# EAGLE board zxuno_panelizado (EAGLE 7.3.0), part 1 of 3
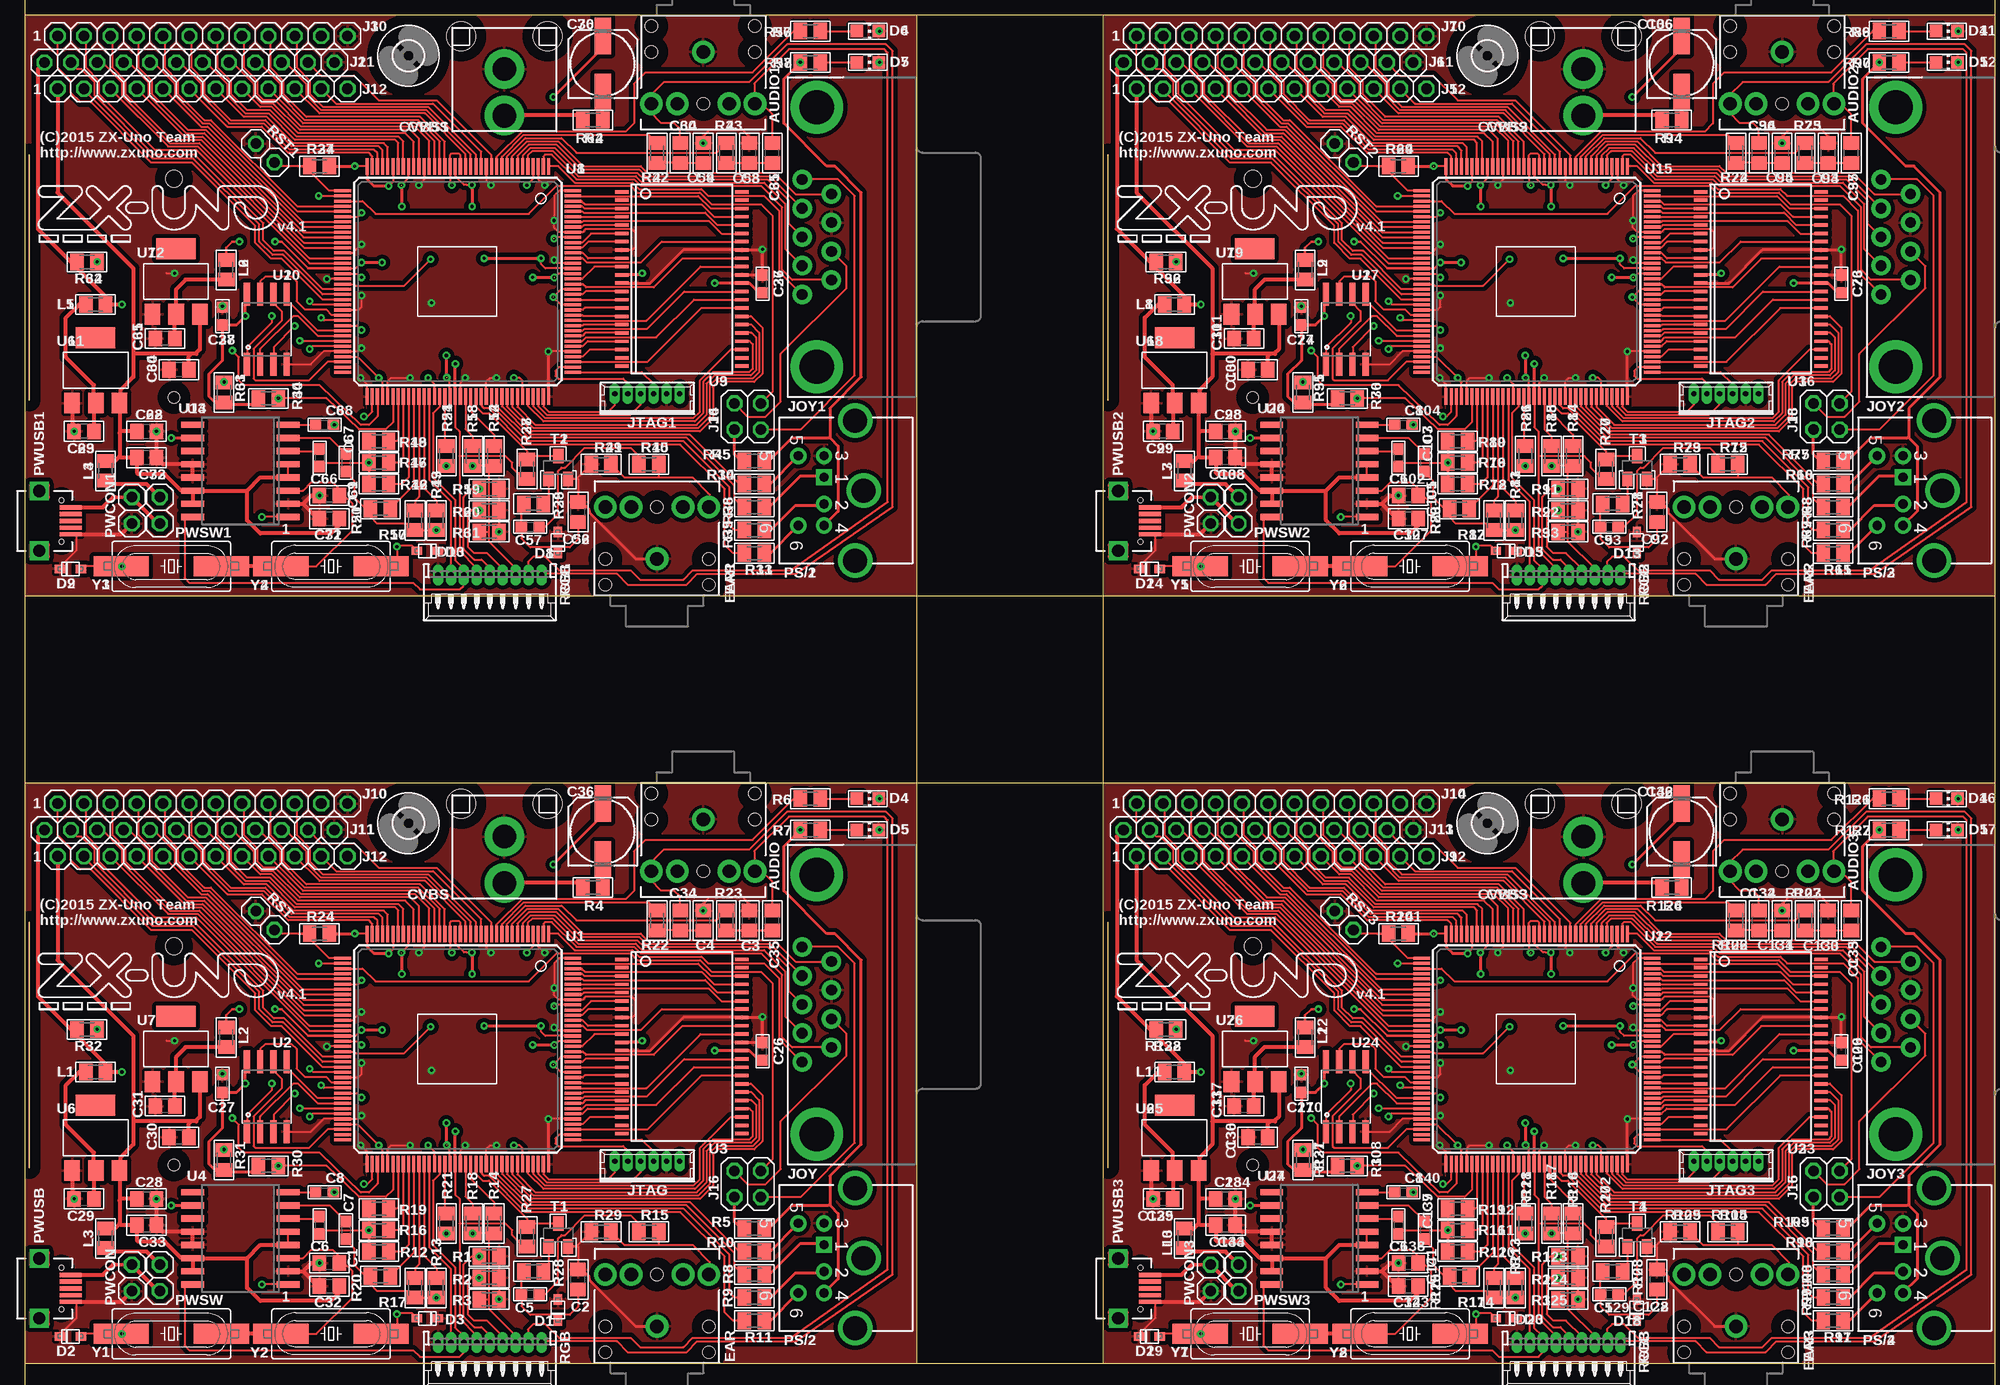
[diagram p0: board, top side]
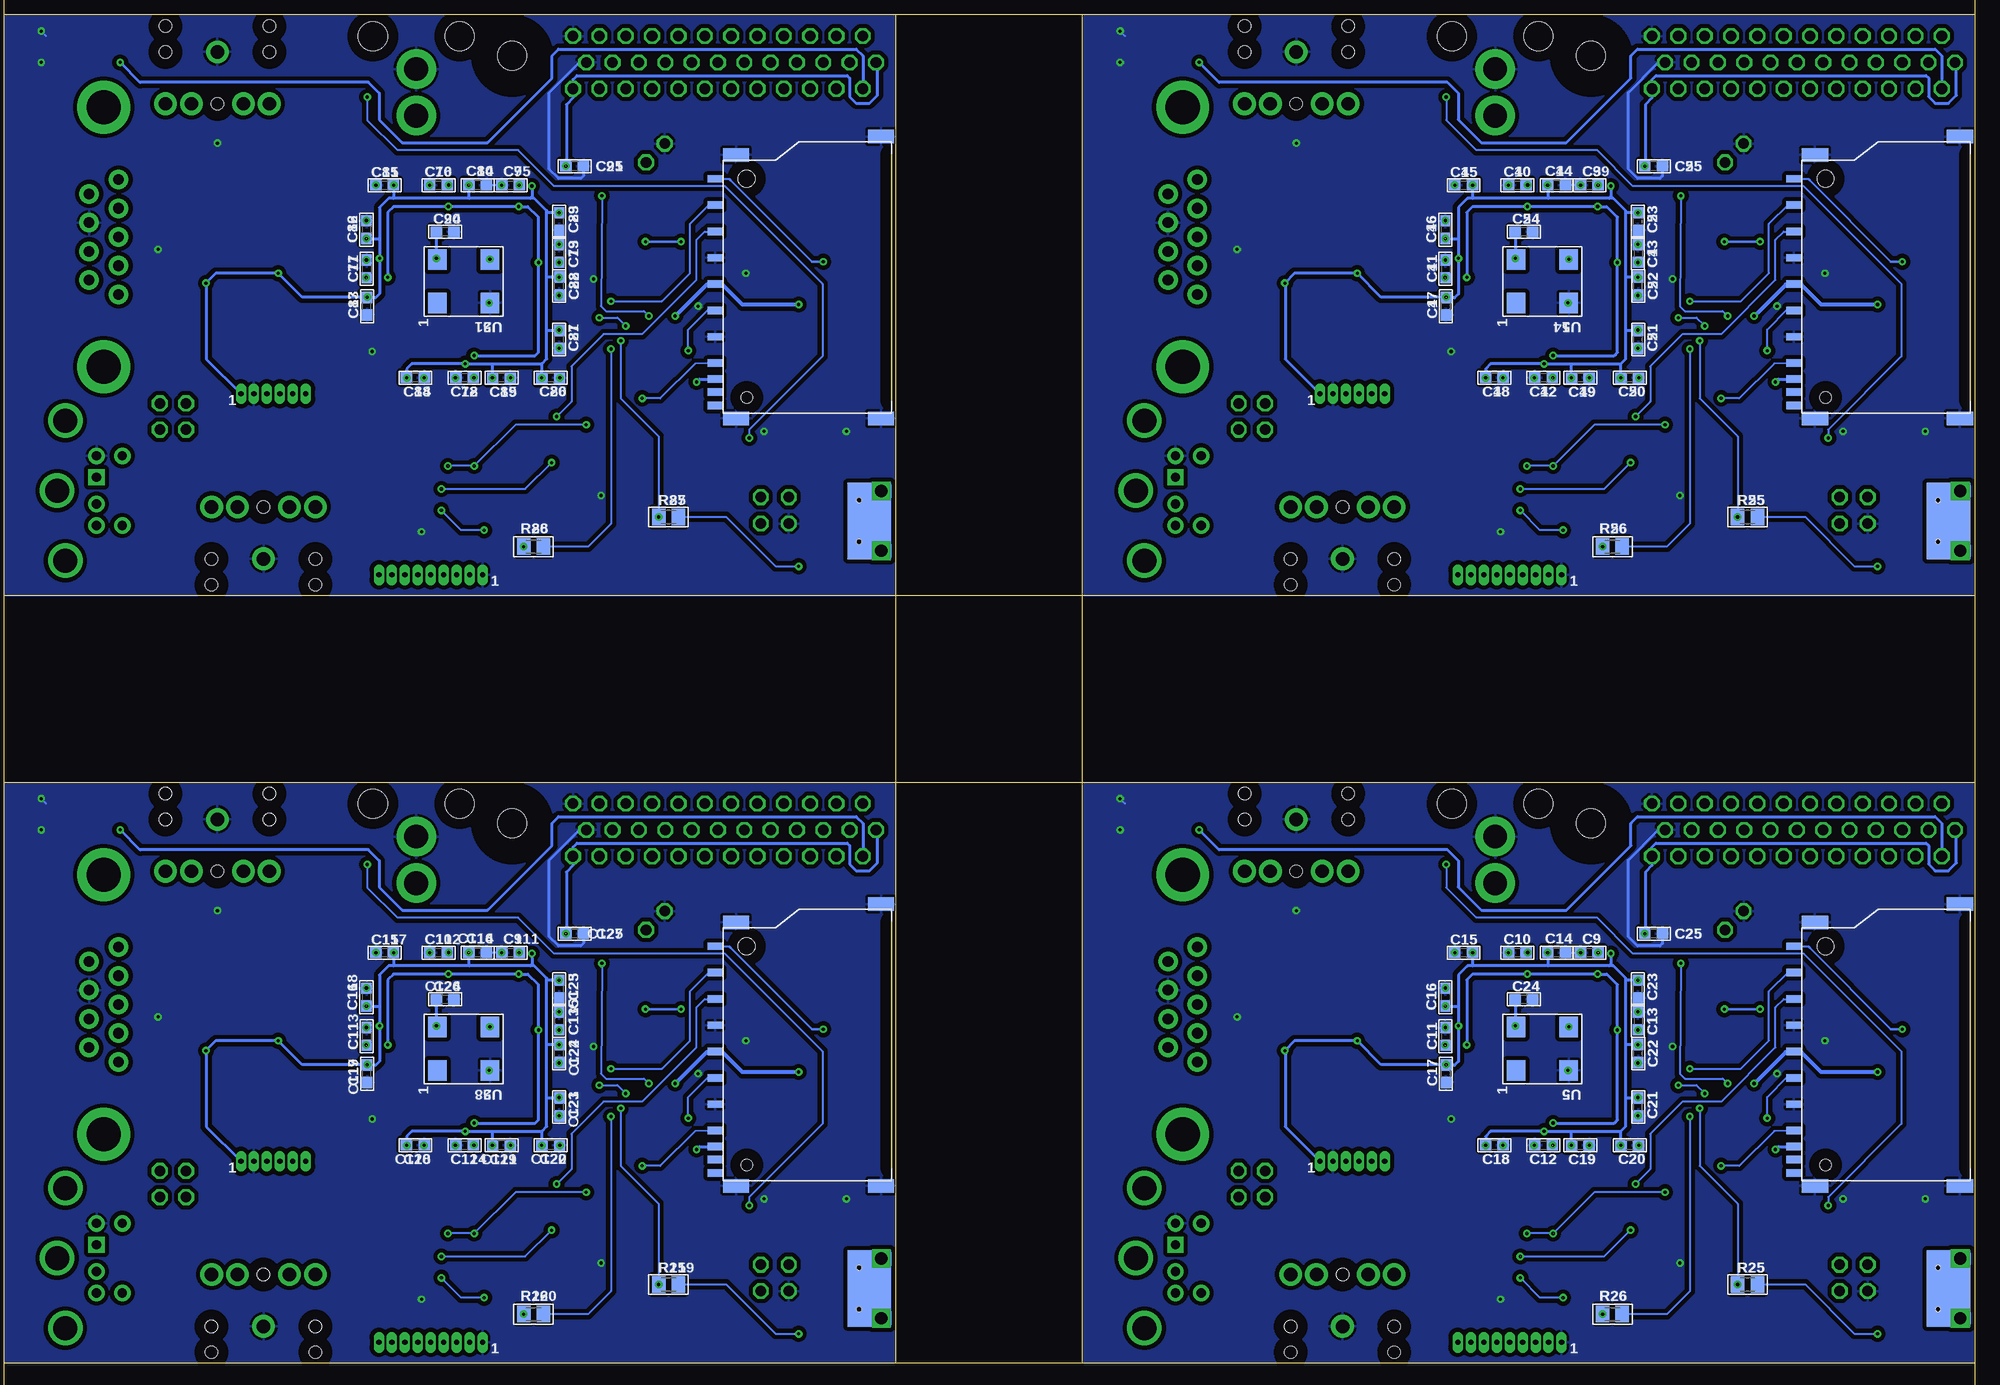
[diagram p1: board, bottom side, seen from below]

Size 104.02 x 97.6 mm. Coordinates in mm from the lower left corner, seen from the top.
Copper layers (1*16): Top 0.035mm / dielectric 1.5mm / Bottom 0.035mm
Design rules "default": minimum track width 10mil, minimum drill 24mil, track to track 8mil, track to pad 8mil, pad to pad 8mil, via to via 8mil, smd to smd 8mil, copper to edge 40mil, drill to drill 8mil, minimum pad ring 10mil, minimum via ring 8mil, stop-mask expansion 4mil, vias tented up to drill 0mil, thermal gap 10mil
Net classes: 0 default: clearance 0.205 mm
Milling: 22 lines

## Footprints (pad centres in the part's own frame; a part is rotated, then mirrored left to right if it is on the bottom)
AUDIO-JACK = drill 1.3 pad 2.184: RING 5,5; RSH 5,2.5; SLEEVE 0,0; TIP 5,-5; TSH 5,-2.5 | hole 1.2: 0,5; -2.5,5; -2.5,-5; 0,-5; 5,0
C0805 = smd 1.3 x 1.5: 1 -0.95,0; 2 0.95,0
C0603 = smd 1.1 x 1: 1 -0.85,0; 2 0.85,0
153CLV-0605 = smd 3.5 x 1.6: + 2.7,0; - -2.7,0
RCA = drill 2.3 pad 3.81: GND 0,0; SIG 0,-4.5 | hole 2.8: -4.175,3.15; 4.175,3.15
SOD-323F = smd 1 x 0.8: A -1,0; C 1,0
CHIP-LED0805 = smd 1.2 x 1.2: A 0,-1.05; C 0,1.05
FIDUCIAL_1MM = smd 1 x 1: 1 0,0
2,8 = hole 2.8: 0,0
1X12 = drill 1.016 octagon: 1 -13.97,0; 2 -11.43,0; 3 -8.89,0; 4 -6.35,0; 5 -3.81,0; 6 -1.27,0; 7 1.27,0; 8 3.81,0; 9 6.35,0; 10 8.89,0; 11 11.43,0; 12 13.97,0
2X02 = drill 1.016 octagon: 1 -1.27,-1.27; 2 -1.27,1.27; 3 1.27,-1.27; 4 1.27,1.27
DB9_MALE = drill 1.016 pad 1.88: 1 5.54,-1.42; 2 2.77,-1.42; 3 0,-1.42; 4 -2.77,-1.42; 5 -5.54,-1.42; 6 4.15,1.42; 7 1.38,1.42; 8 -1.38,1.42; 9 -4.15,1.42 | drill 3.302 pad 5.08: G1 -12.5,0; G2 12.5,0
53047-06 = drill 0.5 pad 0.698 long: 1 3.125,0.45; 2 1.875,0.45; 3 0.625,0.45; 4 -0.625,0.45; 5 -1.875,0.45; 6 -3.125,0.45
M0805 = smd 1.3 x 1.6: 1 -0.95,0; 2 0.95,0
DINC/MIN_TM/6_1PRIMARY = drill 0.889 pad 1.575 square: 1 -1.295,-8.509 | drill 0.889 pad 1.575: 2 1.295,-8.509; 3 -3.353,-8.509; 4 3.353,-8.509; 5 -3.353,-10.998; 6 3.353,-10.998 | drill 2.311 pad 2.845: 7 -6.756,-5.512; 8 0,-4.699; 9 6.756,-5.512
1X02 = drill 1.016 octagon: 1 -1.27,0; 2 1.27,0
MICRO_USB_1PRIMARY = smd 0.406 x 2.108: 1 -1.295,0.381; 2 -0.66,0.381; 3 0,0.381; 4 0.66,0.381; 5 1.295,0.381 | smd 7.366 x 4.191 bottom: 6 0,-1.524 | drill 1.194 pad 1.538 square: 7 -2.87,-2.667; 8 2.87,-2.667 | hole 0.457: -2.007,-0.533; 2.007,-0.533
53048-09 = drill 0.5 pad 0.698 long: 1 5,-1.25; 2 3.75,-1.25; 3 2.5,-1.25; 4 1.25,-1.25; 5 0,-1.25; 6 -1.25,-1.25; 7 -2.5,-1.25; 8 -3.75,-1.25; 9 -5,-1.25
SDCMF-10915W010 = smd 0.711 x 1.422: 1 7.366,13.462; 2 4.826,13.462; 3 2.286,13.462; 4 -0.254,13.462; 5 -2.794,13.462; 6 -5.334,13.462; 7 -7.874,13.462; 8 -9.398,13.462; 9 9.906,13.462; 10 -11.938,13.462; 11 -10.668,13.462 | smd 1.27 x 2.54: M1 12.192,11.43; M2 13.97,-2.54; M3 -13.208,-2.54; M4 -13.208,11.43 | hole 1.6: 9.906,10.414 | hole 1.1: -11.176,10.414
SOT23 = smd 1 x 1.4: 1 -0.95,-1.1; 2 0.95,-1.1; 3 0,1.1
TQ144 = smd 1.6 x 0.3: P1 -11.1,8.75; P2 -11.1,8.25; P3 -11.1,7.75; P4 -11.1,7.25; P5 -11.1,6.75; P6 -11.1,6.25; P7 -11.1,5.75; P8 -11.1,5.25; P9 -11.1,4.75; P10 -11.1,4.25; P11 -11.1,3.75; P12 -11.1,3.25; P13 -11.1,2.75; P14 -11.1,2.25; P15 -11.1,1.75; P16 -11.1,1.25; P17 -11.1,0.75; P18 -11.1,0.25; P19 -11.1,-0.25; P20 -11.1,-0.75; P21 -11.1,-1.25; P22 -11.1,-1.75; P23 -11.1,-2.25; P24 -11.1,-2.75; P25 -11.1,-3.25; P26 -11.1,-3.75; P27 -11.1,-4.25; P28 -11.1,-4.75; P29 -11.1,-5.25; P30 -11.1,-5.75; P31 -11.1,-6.25; P32 -11.1,-6.75; P33 -11.1,-7.25; P34 -11.1,-7.75; P35 -11.1,-8.25; P36 -11.1,-8.75; P73 11.1,-8.75; P74 11.1,-8.25; P75 11.1,-7.75; P76 11.1,-7.25; P77 11.1,-6.75; P78 11.1,-6.25; P79 11.1,-5.75; P80 11.1,-5.25; P81 11.1,-4.75; P82 11.1,-4.25; P83 11.1,-3.75; P84 11.1,-3.25; P85 11.1,-2.75; P86 11.1,-2.25; P87 11.1,-1.75; P88 11.1,-1.25; P89 11.1,-0.75; P90 11.1,-0.25; P91 11.1,0.25; P92 11.1,0.75; P93 11.1,1.25; P94 11.1,1.75; P95 11.1,2.25; P96 11.1,2.75; P97 11.1,3.25; P98 11.1,3.75; P99 11.1,4.25; P100 11.1,4.75; P101 11.1,5.25; P102 11.1,5.75; P103 11.1,6.25; P104 11.1,6.75; P105 11.1,7.25; P106 11.1,7.75; P107 11.1,8.25; P108 11.1,8.75 | smd 0.3 x 1.6: P37 -8.75,-11.1; P38 -8.25,-11.1; P39 -7.75,-11.1; P40 -7.25,-11.1; P41 -6.75,-11.1; P42 -6.25,-11.1; P43 -5.75,-11.1; P44 -5.25,-11.1; P45 -4.75,-11.1; P46 -4.25,-11.1; P47 -3.75,-11.1; P48 -3.25,-11.1; P49 -2.75,-11.1; P50 -2.25,-11.1; P51 -1.75,-11.1; P52 -1.25,-11.1; P53 -0.75,-11.1; P54 -0.25,-11.1; P55 0.25,-11.1; P56 0.75,-11.1; P57 1.25,-11.1; P58 1.75,-11.1; P59 2.25,-11.1; P60 2.75,-11.1; P61 3.25,-11.1; P62 3.75,-11.1; P63 4.25,-11.1; P64 4.75,-11.1; P65 5.25,-11.1; P66 5.75,-11.1; P67 6.25,-11.1; P68 6.75,-11.1; P69 7.25,-11.1; P70 7.75,-11.1; P71 8.25,-11.1; P72 8.75,-11.1; P109 8.75,11.1; P110 8.25,11.1; P111 7.75,11.1; P112 7.25,11.1; P113 6.75,11.1; P114 6.25,11.1; P115 5.75,11.1; P116 5.25,11.1; P117 4.75,11.1; P118 4.25,11.1; P119 3.75,11.1; P120 3.25,11.1; P121 2.75,11.1; P122 2.25,11.1; P123 1.75,11.1; P124 1.25,11.1; P125 0.75,11.1; P126 0.25,11.1; P127 -0.25,11.1; P128 -0.75,11.1; P129 -1.25,11.1; P130 -1.75,11.1; P131 -2.25,11.1; P132 -2.75,11.1; P133 -3.25,11.1; P134 -3.75,11.1; P135 -4.25,11.1; P136 -4.75,11.1; P137 -5.25,11.1; P138 -5.75,11.1; P139 -6.25,11.1; P140 -6.75,11.1; P141 -7.25,11.1; P142 -7.75,11.1; P143 -8.25,11.1; P144 -8.75,11.1
SO08-EIAJ = smd 0.61 x 2.21: 1 -1.905,-3.378; 2 -0.635,-3.378; 3 0.635,-3.378; 4 1.905,-3.378; 5 1.905,3.353; 6 0.635,3.353; 7 -0.635,3.353; 8 -1.905,3.353
TSOP44-II = smd 0.32 x 1.3: 1 -8.4,-5.8; 2 -7.6,-5.8; 3 -6.8,-5.8; 4 -6,-5.8; 5 -5.2,-5.8; 6 -4.4,-5.8; 7 -3.6,-5.8; 8 -2.8,-5.8; 9 -2,-5.8; 10 -1.2,-5.8; 11 -0.4,-5.8; 12 0.4,-5.8; 13 1.2,-5.8; 14 2,-5.8; 15 2.8,-5.8; 16 3.6,-5.8; 17 4.4,-5.8; 18 5.2,-5.8; 19 6,-5.8; 20 6.8,-5.8; 21 7.6,-5.8; 22 8.4,-5.8; 23 8.4,5.8; 24 7.6,5.8; 25 6.8,5.8; 26 6,5.8; 27 5.2,5.8; 28 4.4,5.8; 29 3.6,5.8; 30 2.8,5.8; 31 2,5.8; 32 1.2,5.8; 33 0.4,5.8; 34 -0.4,5.8; 35 -1.2,5.8; 36 -2,5.8; 37 -2.8,5.8; 38 -3.6,5.8; 39 -4.4,5.8; 40 -5.2,5.8; 41 -6,5.8; 42 -6.8,5.8; 43 -7.6,5.8; 44 -8.4,5.8
SO16W = smd 0.6 x 2.2: 1 -4.445,-4.6; 2 -3.175,-4.6; 3 -1.905,-4.6; 4 -0.635,-4.6; 5 0.635,-4.6; 6 1.905,-4.6; 7 3.175,-4.6; 8 4.445,-4.6; 9 4.445,4.6; 10 3.175,4.6; 11 1.905,4.6; 12 0.635,4.6; 13 -0.635,4.6; 14 -1.905,4.6; 15 -3.175,4.6; 16 -4.445,4.6
SM/OSC_1PRIMARY = smd 1.778 x 1.981: 1 0,0; 2 -5.08,0; 3 -5.08,-4.191; 4 0,-4.191
SOT223 = smd 1.499 x 2.007: 1 -2.261,-3.15; 2 0.025,-3.15; 3 2.311,-3.15 | smd 3.81 x 2.007: 4 0,3.15
HC49UP = smd 5.334 x 1.93: 1 -4.826,0; 2 4.826,0

## Placement (x,y rotation side)
AUDIO  Audio  [AUDIO-JACK]  64.99,33.56 270 top
AUDIO1  Audio  [AUDIO-JACK]  64.99,107.54 270 top  (outside the outline)
AUDIO2  Audio  [AUDIO-JACK]  169.01,107.54 270 top  (outside the outline)
AUDIO3  Audio  [AUDIO-JACK]  169.01,33.56 270 top  (outside the outline)
C1  7.5pF  [C0805]  28.96,-9.21 180 top  (outside the outline)
C2  10nF  [C0805]  52.93,-10.8 90 top  (outside the outline)
C3  10nF  [C0805]  69.44,23.81 90 top
C4  10nF  [C0805]  64.99,23.81 90 top
C5  100nF  [C0603]  48.32,-12.22 0 top  (outside the outline)
C6  100nF  [C0603]  28,-5.56 270 top  (outside the outline)
C7  100nF  [C0603]  30.54,-6.03 270 top  (outside the outline)
C8  100nF  [C0603]  28.48,-2.38 0 top
C9  100nF  [C0603]  36.73,20.72 0 bottom
C10  100nF  [C0603]  43.68,20.72 0 bottom
C11  100nF  [C0603]  50.61,12.64 270 bottom
C12  100nF  [C0603]  41.16,2.16 0 bottom
C13  100nF  [C0603]  32.05,14.13 270 bottom
C14  100nF  [C0603]  39.89,20.72 180 bottom
C15  100nF  [C0603]  48.86,20.72 0 bottom
C16  100nF  [C0603]  50.63,16.43 270 bottom
C17  100nF  [C0603]  50.57,9.05 90 bottom
C18  100nF  [C0603]  45.9,2.16 180 bottom
C19  100nF  [C0603]  37.61,2.14 180 bottom
C20  100nF  [C0603]  32.85,2.14 180 bottom
C21  100nF  [C0603]  32.03,5.83 90 bottom
C22  100nF  [C0603]  32.03,10.99 90 bottom
C23  100nF  [C0603]  32.05,17.2 90 bottom
C24  100nF  [C0603]  43.05,16.21 180 bottom
C25  100nF  [C0603]  30.54,22.54 180 bottom
C26  100nF  [C0603]  70.71,11.19 90 top
C27  100nF  [C0603]  18.64,8.1 270 top
C28  10uF  [C0805]  11.33,-3.02 0 top  (outside the outline)
C29  10uF  [C0805]  5.3,-3.02 180 top  (outside the outline)
C30  10uF  [C0805]  14.45,2.92 180 top
C31  10uF  [C0805]  13.11,5.92 180 top
C32  10uF  [C0805]  28.96,-11.43 0 top  (outside the outline)
C33  10uF  [C0805]  11.33,-5.56 180 top  (outside the outline)
C34  10uF  [C0805]  62.77,23.81 90 top
C35  10uF  [C0805]  71.66,23.81 90 top
C36  220uF  [153CLV-0605]  55.31,32.38 90 top
C37  100nF  [C0603]  70.71,85.17 90 top
C38  100nF  [C0603]  18.64,82.07 270 top
C39  100nF  [C0603]  36.73,94.69 0 bottom
C40  100nF  [C0603]  43.68,94.69 0 bottom
C41  100nF  [C0603]  50.61,86.62 270 bottom
C42  100nF  [C0603]  41.16,76.14 0 bottom
C43  100nF  [C0603]  32.05,88.11 270 bottom
C44  100nF  [C0603]  39.89,94.69 180 bottom
C45  100nF  [C0603]  48.86,94.69 0 bottom
C46  100nF  [C0603]  50.63,90.41 270 bottom
C47  100nF  [C0603]  50.57,83.03 90 bottom
C48  100nF  [C0603]  45.9,76.14 180 bottom
C49  100nF  [C0603]  37.61,76.12 180 bottom
C50  100nF  [C0603]  32.85,76.12 180 bottom
C51  100nF  [C0603]  32.03,79.81 90 bottom
C52  100nF  [C0603]  32.03,84.97 90 bottom
C53  100nF  [C0603]  32.05,91.18 90 bottom
C54  100nF  [C0603]  43.05,90.19 180 bottom
C55  100nF  [C0603]  30.54,96.52 180 bottom
C56  10nF  [C0805]  52.93,63.18 90 top
C57  100nF  [C0603]  48.32,61.75 0 top
C58  10nF  [C0805]  69.44,97.79 90 top
C59  10nF  [C0805]  64.99,97.79 90 top
C60  10uF  [C0805]  62.77,97.79 90 top
C61  10uF  [C0805]  71.66,97.79 90 top
C62  10uF  [C0805]  11.33,70.96 0 top
C63  10uF  [C0805]  5.3,70.96 180 top
C64  10uF  [C0805]  14.45,76.9 180 top
C65  10uF  [C0805]  13.11,79.9 180 top
C66  100nF  [C0603]  28,68.42 270 top
C67  100nF  [C0603]  30.54,67.94 270 top
C68  100nF  [C0603]  28.48,71.6 0 top
C69  7.5pF  [C0805]  28.96,64.77 180 top
C70  220uF  [153CLV-0605]  55.31,106.36 90 top  (outside the outline)
C71  10uF  [C0805]  28.96,62.55 0 top
C72  10uF  [C0805]  11.33,68.42 180 top
C73  100nF  [C0603]  174.73,85.17 90 top  (outside the outline)
C74  100nF  [C0603]  122.66,82.07 270 top  (outside the outline)
C75  100nF  [C0603]  140.76,94.69 0 bottom  (outside the outline)
C76  100nF  [C0603]  147.7,94.69 0 bottom  (outside the outline)
C77  100nF  [C0603]  154.63,86.62 270 bottom  (outside the outline)
C78  100nF  [C0603]  145.18,76.14 0 bottom  (outside the outline)
C79  100nF  [C0603]  136.07,88.11 270 bottom  (outside the outline)
C80  100nF  [C0603]  143.91,94.69 180 bottom  (outside the outline)
C81  100nF  [C0603]  152.88,94.69 0 bottom  (outside the outline)
C82  100nF  [C0603]  154.65,90.41 270 bottom  (outside the outline)
C83  100nF  [C0603]  154.59,83.03 90 bottom  (outside the outline)
C84  100nF  [C0603]  149.92,76.14 180 bottom  (outside the outline)
C85  100nF  [C0603]  141.63,76.12 180 bottom  (outside the outline)
C86  100nF  [C0603]  136.87,76.12 180 bottom  (outside the outline)
C87  100nF  [C0603]  136.05,79.81 90 bottom  (outside the outline)
C88  100nF  [C0603]  136.05,84.97 90 bottom  (outside the outline)
C89  100nF  [C0603]  136.07,91.18 90 bottom  (outside the outline)
C90  100nF  [C0603]  147.07,90.19 180 bottom  (outside the outline)
C91  100nF  [C0603]  134.56,96.52 180 bottom  (outside the outline)
C92  10nF  [C0805]  156.95,63.18 90 top  (outside the outline)
C93  100nF  [C0603]  152.34,61.75 0 top  (outside the outline)
C94  10nF  [C0805]  173.46,97.79 90 top  (outside the outline)
C95  10nF  [C0805]  169.01,97.79 90 top  (outside the outline)
C96  10uF  [C0805]  166.79,97.79 90 top  (outside the outline)
C97  10uF  [C0805]  175.68,97.79 90 top  (outside the outline)
C98  10uF  [C0805]  115.36,70.96 0 top  (outside the outline)
C99  10uF  [C0805]  109.32,70.96 180 top  (outside the outline)
C100  10uF  [C0805]  118.47,76.9 180 top  (outside the outline)
C101  10uF  [C0805]  117.13,79.9 180 top  (outside the outline)
C102  100nF  [C0603]  132.02,68.42 270 top  (outside the outline)
C103  100nF  [C0603]  134.56,67.94 270 top  (outside the outline)
C104  100nF  [C0603]  132.5,71.6 0 top  (outside the outline)
C105  7.5pF  [C0805]  132.98,64.77 180 top  (outside the outline)
C106  220uF  [153CLV-0605]  159.33,106.36 90 top  (outside the outline)
C107  10uF  [C0805]  132.98,62.55 0 top  (outside the outline)
C108  10uF  [C0805]  115.36,68.42 180 top  (outside the outline)
C109  100nF  [C0603]  174.73,11.19 90 top  (outside the outline)
C110  100nF  [C0603]  122.66,8.1 270 top  (outside the outline)
C111  100nF  [C0603]  140.76,20.72 0 bottom  (outside the outline)
C112  100nF  [C0603]  147.7,20.72 0 bottom  (outside the outline)
C113  100nF  [C0603]  154.63,12.64 270 bottom  (outside the outline)
C114  100nF  [C0603]  145.18,2.16 0 bottom  (outside the outline)
C115  100nF  [C0603]  136.07,14.13 270 bottom  (outside the outline)
C116  100nF  [C0603]  143.91,20.72 180 bottom  (outside the outline)
C117  100nF  [C0603]  152.88,20.72 0 bottom  (outside the outline)
C118  100nF  [C0603]  154.65,16.43 270 bottom  (outside the outline)
C119  100nF  [C0603]  154.59,9.05 90 bottom  (outside the outline)
C120  100nF  [C0603]  149.92,2.16 180 bottom  (outside the outline)
C121  100nF  [C0603]  141.63,2.14 180 bottom  (outside the outline)
C122  100nF  [C0603]  136.87,2.14 180 bottom  (outside the outline)
C123  100nF  [C0603]  136.05,5.83 90 bottom  (outside the outline)
C124  100nF  [C0603]  136.05,10.99 90 bottom  (outside the outline)
C125  100nF  [C0603]  136.07,17.2 90 bottom  (outside the outline)
C126  100nF  [C0603]  147.07,16.21 180 bottom  (outside the outline)
C127  100nF  [C0603]  134.56,22.54 180 bottom  (outside the outline)
C128  10nF  [C0805]  156.95,-10.8 90 top  (outside the outline)
C129  100nF  [C0603]  152.34,-12.22 0 top  (outside the outline)
C130  10nF  [C0805]  173.46,23.81 90 top  (outside the outline)
C131  10nF  [C0805]  169.01,23.81 90 top  (outside the outline)
C132  10uF  [C0805]  166.79,23.81 90 top  (outside the outline)
C133  10uF  [C0805]  175.68,23.81 90 top  (outside the outline)
C134  10uF  [C0805]  115.36,-3.02 0 top  (outside the outline)
C135  10uF  [C0805]  109.32,-3.02 180 top  (outside the outline)
C136  10uF  [C0805]  118.47,2.92 180 top  (outside the outline)
C137  10uF  [C0805]  117.13,5.92 180 top  (outside the outline)
C138  100nF  [C0603]  132.02,-5.56 270 top  (outside the outline)
C139  100nF  [C0603]  134.56,-6.03 270 top  (outside the outline)
C140  100nF  [C0603]  132.5,-2.38 0 top  (outside the outline)
C141  7.5pF  [C0805]  132.98,-9.21 180 top  (outside the outline)
C142  220uF  [153CLV-0605]  159.33,32.38 90 top  (outside the outline)
C143  10uF  [C0805]  132.98,-11.43 0 top  (outside the outline)
C144  10uF  [C0805]  115.36,-5.56 180 top  (outside the outline)
CVBS  RCA  [RCA]  45.82,31.91 0 top
CVBS1  RCA  [RCA]  45.82,105.89 0 top  (outside the outline)
CVBS2  RCA  [RCA]  149.84,105.89 0 top  (outside the outline)
CVBS3  RCA  [RCA]  149.84,31.91 0 top  (outside the outline)
D1  [SOD-323F]  50.98,-13.73 270 top  (outside the outline)
D2  [SOD-323F]  3.99,-16.27 180 top  (outside the outline)
D3  [SOD-323F]  38.4,-14.53 0 top  (outside the outline)
D4  [CHIP-LED0805]  80.87,35.56 270 top
D5  [CHIP-LED0805]  80.87,32.54 270 top
D6  [CHIP-LED0805]  80.87,109.54 270 top  (outside the outline)
D7  [CHIP-LED0805]  80.87,106.52 270 top  (outside the outline)
D8  [SOD-323F]  50.98,60.25 270 top
D9  [SOD-323F]  3.99,57.71 180 top
D10  [SOD-323F]  38.4,59.44 0 top
D11  [CHIP-LED0805]  184.89,109.54 270 top  (outside the outline)
D12  [CHIP-LED0805]  184.89,106.52 270 top  (outside the outline)
D13  [SOD-323F]  155,60.25 270 top  (outside the outline)
D14  [SOD-323F]  108.01,57.71 180 top
D15  [SOD-323F]  142.42,59.44 0 top  (outside the outline)
D16  [CHIP-LED0805]  184.89,35.56 270 top  (outside the outline)
D17  [CHIP-LED0805]  184.89,32.54 270 top  (outside the outline)
D18  [SOD-323F]  155,-13.73 270 top  (outside the outline)
D19  [SOD-323F]  108.01,-16.27 180 top  (outside the outline)
D20  [SOD-323F]  142.42,-14.53 0 top  (outside the outline)
E$1  [FIDUCIAL_1MM]  4.67,-23.81 0 top  (outside the outline)
E$2  [FIDUCIAL_1MM]  185.01,115.89 0 top  (outside the outline)
EAR  EAR  [AUDIO-JACK]  60.55,-15.3 90 top  (outside the outline)
EAR1  EAR  [AUDIO-JACK]  60.55,58.67 90 top
EAR2  EAR  [AUDIO-JACK]  164.57,58.67 90 top  (outside the outline)
EAR3  EAR  [AUDIO-JACK]  164.57,-15.3 90 top  (outside the outline)
H1  MOUNT-HOLE2.8  [2,8]  36.58,33.18 0 top
H2  MOUNT-HOLE2.8  [2,8]  36.58,107.16 0 top  (outside the outline)
H3  MOUNT-HOLE2.8  [2,8]  140.6,107.16 0 top  (outside the outline)
H4  MOUNT-HOLE2.8  [2,8]  140.6,33.18 0 top  (outside the outline)
J1  [1X12]  16.73,103.98 0 top  (outside the outline)
J2  [1X12]  15.46,106.52 0 top  (outside the outline)
J3  [1X12]  16.73,109.06 0 top  (outside the outline)
J4  [2X02]  69.28,72.39 180 top
J5  [1X12]  120.75,103.98 0 top  (outside the outline)
J6  [1X12]  119.48,106.52 0 top  (outside the outline)
J7  [1X12]  120.75,109.06 0 top  (outside the outline)
J8  [2X02]  173.3,72.39 180 top  (outside the outline)
J9  [1X12]  120.75,30 0 top
J10  [1X12]  16.73,35.08 0 top
J11  [1X12]  15.46,32.54 0 top
J12  [1X12]  16.73,30 0 top
J13  [1X12]  119.48,32.54 0 top
J14  [1X12]  120.75,35.08 0 top
J15  [2X02]  173.3,-1.59 180 top  (outside the outline)
J16  [2X02]  69.28,-1.59 180 top
JOY  [DB9_MALE]  75.95,15.72 270 top
JOY1  [DB9_MALE]  75.95,89.69 270 top
JOY2  [DB9_MALE]  179.97,89.69 270 top  (outside the outline)
JOY3  [DB9_MALE]  179.97,15.72 270 top  (outside the outline)
JTAG  JTAG  [53047-06]  59.59,0.16 0 top
JTAG1  JTAG  [53047-06]  59.59,74.14 0 top
JTAG2  JTAG  [53047-06]  163.62,74.14 0 top  (outside the outline)
JTAG3  JTAG  [53047-06]  163.62,0.16 0 top  (outside the outline)
L1  [M0805]  6.41,9.21 0 top
L2  [M0805]  19.01,12.56 90 top
L3  [M0805]  7.37,-6.83 90 top  (outside the outline)
L4  [M0805]  7.37,67.15 90 top
L5  [M0805]  6.41,83.19 0 top
L6  [M0805]  19.01,86.53 90 top
L7  [M0805]  111.39,67.15 90 top  (outside the outline)
L8  [M0805]  110.43,83.19 0 top  (outside the outline)
L9  [M0805]  123.03,86.53 90 top  (outside the outline)
L10  [M0805]  111.39,-6.83 90 top  (outside the outline)
L11  [M0805]  110.43,9.21 0 top  (outside the outline)
L12  [M0805]  123.03,12.56 90 top  (outside the outline)
PS/1  PS/2 Keyb  [DINC/MIN_TM/6_1PRIMARY]  85.15,65.25 270 top
PS/2  PS/2 Keyb  [DINC/MIN_TM/6_1PRIMARY]  85.15,-8.73 270 top
PS/3  PS/2 Keyb  [DINC/MIN_TM/6_1PRIMARY]  189.17,65.25 270 top  (outside the outline)
PS/4  PS/2 Keyb  [DINC/MIN_TM/6_1PRIMARY]  189.17,-8.73 270 top  (outside the outline)
PWCON  [1X02]  9.91,-10.64 90 top  (outside the outline)
PWCON1  [1X02]  9.91,63.34 90 top
PWCON2  [1X02]  113.93,63.34 90 top  (outside the outline)
PWCON3  [1X02]  113.93,-10.64 90 top  (outside the outline)
PWSW  [1X02]  12.6,-10.64 270 top  (outside the outline)
PWSW1  [1X02]  12.6,63.34 270 top
PWSW2  [1X02]  116.63,63.34 270 top  (outside the outline)
PWSW3  [1X02]  116.63,-10.64 270 top  (outside the outline)
PWUSB  MICROUSB  [MICRO_USB_1PRIMARY]  3.65,-11.65 270 top  (outside the outline)
PWUSB1  MICROUSB  [MICRO_USB_1PRIMARY]  3.65,62.33 270 top
PWUSB2  MICROUSB  [MICRO_USB_1PRIMARY]  107.67,62.33 270 top
PWUSB3  MICROUSB  [MICRO_USB_1PRIMARY]  107.67,-11.65 270 top  (outside the outline)
R1  75  [M0805]  44.35,-8.57 0 top  (outside the outline)
R2  75  [M0805]  44.35,-10.64 0 top  (outside the outline)
R3  75  [M0805]  44.35,-12.7 0 top  (outside the outline)
R4  75  [M0805]  54.36,26.99 180 top
R5  510  [M0805]  69.91,-5.87 180 top  (outside the outline)
R6  510  [M0805]  75.31,35.56 180 top
R7  510  [M0805]  75.31,32.54 180 top
R8  510  [M0805]  69.91,-10.32 180 top  (outside the outline)
R9  510  [M0805]  69.91,-12.54 180 top  (outside the outline)
R10  510  [M0805]  69.91,-8.1 180 top  (outside the outline)
R11  510  [M0805]  69.91,-14.76 180 top  (outside the outline)
R12  510  [M0805]  33.72,-8.1 0 top  (outside the outline)
R13  510  [M0805]  39.27,-11.59 90 top  (outside the outline)
R14  510  [M0805]  44.83,-5.4 90 top  (outside the outline)
R15  510  [M0805]  59.75,-6.19 180 top  (outside the outline)
R16  1K  [M0805]  33.72,-6.03 0 top  (outside the outline)
R17  1K  [M0805]  37.21,-11.59 90 top  (outside the outline)
R18  1K  [M0805]  42.77,-5.4 90 top  (outside the outline)
R19  2K  [M0805]  33.72,-3.97 0 top  (outside the outline)
R20  2K  [M0805]  33.88,-10.48 0 top  (outside the outline)
R21  2K  [M0805]  40.23,-5.4 90 top  (outside the outline)
R22  2K  [M0805]  60.55,23.81 90 top
R23  2K  [M0805]  67.21,23.81 90 top
R24  2K  [M0805]  28,22.54 0 top
R25  10K  [M0805]  21.49,-11.27 0 bottom  (outside the outline)
R26  10K  [M0805]  34.51,-14.13 0 bottom  (outside the outline)
R27  10K  [M0805]  48.01,-6.67 270 top  (outside the outline)
R28  10K  [M0805]  48.64,-10 0 top  (outside the outline)
R29  10K  [M0805]  55.15,-6.19 180 top  (outside the outline)
R30  10K  [M0805]  23.08,0.16 0 top
R31  10K  [M0805]  18.8,0.73 270 top
R32  10K  [M0805]  5.59,13.3 180 top
R33  510  [M0805]  69.91,59.21 180 top
R34  510  [M0805]  69.91,65.88 180 top
R35  510  [M0805]  69.91,61.44 180 top
R36  510  [M0805]  69.91,63.66 180 top
R37  2K  [M0805]  28,96.52 0 top
R38  10K  [M0805]  48.01,67.31 270 top
R39  10K  [M0805]  48.64,63.98 0 top
R40  510  [M0805]  59.75,67.79 180 top
R41  10K  [M0805]  55.15,67.79 180 top
R42  2K  [M0805]  60.55,97.79 90 top
R43  2K  [M0805]  67.21,97.79 90 top
R44  10K  [M0805]  23.08,74.14 0 top
R45  510  [M0805]  69.91,68.1 180 top
R46  510  [M0805]  33.72,65.88 0 top
R47  1K  [M0805]  33.72,67.94 0 top
R48  2K  [M0805]  33.72,70.01 0 top
R49  510  [M0805]  39.27,62.39 90 top
R50  1K  [M0805]  37.21,62.39 90 top
R51  2K  [M0805]  33.88,63.5 0 top
R52  510  [M0805]  44.83,68.58 90 top
R53  1K  [M0805]  42.77,68.58 90 top
R54  2K  [M0805]  40.23,68.58 90 top
R55  10K  [M0805]  21.49,62.71 0 bottom
R56  10K  [M0805]  34.51,59.85 0 bottom
R57  510  [M0805]  75.31,109.54 180 top  (outside the outline)
R58  510  [M0805]  75.31,106.52 180 top  (outside the outline)
R59  75  [M0805]  44.35,65.41 0 top
R60  75  [M0805]  44.35,63.34 0 top
R61  75  [M0805]  44.35,61.28 0 top
R62  75  [M0805]  54.36,100.97 180 top  (outside the outline)
R63  10K  [M0805]  18.8,74.71 270 top
R64  10K  [M0805]  5.59,87.28 180 top
R65  510  [M0805]  173.93,59.21 180 top  (outside the outline)
R66  510  [M0805]  173.93,65.88 180 top  (outside the outline)
R67  510  [M0805]  173.93,61.44 180 top  (outside the outline)
R68  510  [M0805]  173.93,63.66 180 top  (outside the outline)
R69  2K  [M0805]  132.02,96.52 0 top  (outside the outline)
R70  10K  [M0805]  152.03,67.31 270 top  (outside the outline)
R71  10K  [M0805]  152.66,63.98 0 top  (outside the outline)
R72  510  [M0805]  163.77,67.79 180 top  (outside the outline)
R73  10K  [M0805]  159.17,67.79 180 top  (outside the outline)
R74  2K  [M0805]  164.57,97.79 90 top  (outside the outline)
R75  2K  [M0805]  171.24,97.79 90 top  (outside the outline)
R76  10K  [M0805]  127.1,74.14 0 top  (outside the outline)
R77  510  [M0805]  173.93,68.1 180 top  (outside the outline)
R78  510  [M0805]  137.74,65.88 0 top  (outside the outline)
R79  1K  [M0805]  137.74,67.94 0 top  (outside the outline)
R80  2K  [M0805]  137.74,70.01 0 top  (outside the outline)
R81  510  [M0805]  143.3,62.39 90 top  (outside the outline)
R82  1K  [M0805]  141.23,62.39 90 top  (outside the outline)
R83  2K  [M0805]  137.9,63.5 0 top  (outside the outline)
R84  510  [M0805]  148.85,68.58 90 top  (outside the outline)
R85  1K  [M0805]  146.79,68.58 90 top  (outside the outline)
R86  2K  [M0805]  144.25,68.58 90 top  (outside the outline)
R87  10K  [M0805]  125.52,62.71 0 bottom  (outside the outline)
R88  10K  [M0805]  138.53,59.85 0 bottom  (outside the outline)
R89  510  [M0805]  179.33,109.54 180 top  (outside the outline)
R90  510  [M0805]  179.33,106.52 180 top  (outside the outline)
R91  75  [M0805]  148.38,65.41 0 top  (outside the outline)
R92  75  [M0805]  148.38,63.34 0 top  (outside the outline)
R93  75  [M0805]  148.38,61.28 0 top  (outside the outline)
R94  75  [M0805]  158.38,100.97 180 top  (outside the outline)
R95  10K  [M0805]  122.82,74.71 270 top  (outside the outline)
R96  10K  [M0805]  109.61,87.28 180 top  (outside the outline)
R97  510  [M0805]  173.93,-14.76 180 top  (outside the outline)
R98  510  [M0805]  173.93,-8.1 180 top  (outside the outline)
R99  510  [M0805]  173.93,-12.54 180 top  (outside the outline)
R100  510  [M0805]  173.93,-10.32 180 top  (outside the outline)
R101  2K  [M0805]  132.02,22.54 0 top  (outside the outline)
R102  10K  [M0805]  152.03,-6.67 270 top  (outside the outline)
R103  10K  [M0805]  152.66,-10 0 top  (outside the outline)
R104  510  [M0805]  163.77,-6.19 180 top  (outside the outline)
R105  10K  [M0805]  159.17,-6.19 180 top  (outside the outline)
R106  2K  [M0805]  164.57,23.81 90 top  (outside the outline)
R107  2K  [M0805]  171.24,23.81 90 top  (outside the outline)
R108  10K  [M0805]  127.1,0.16 0 top  (outside the outline)
R109  510  [M0805]  173.93,-5.87 180 top  (outside the outline)
R110  510  [M0805]  137.74,-8.1 0 top  (outside the outline)
R111  1K  [M0805]  137.74,-6.03 0 top  (outside the outline)
R112  2K  [M0805]  137.74,-3.97 0 top  (outside the outline)
R113  510  [M0805]  143.3,-11.59 90 top  (outside the outline)
R114  1K  [M0805]  141.23,-11.59 90 top  (outside the outline)
R115  2K  [M0805]  137.9,-10.48 0 top  (outside the outline)
R116  510  [M0805]  148.85,-5.4 90 top  (outside the outline)
R117  1K  [M0805]  146.79,-5.4 90 top  (outside the outline)
R118  2K  [M0805]  144.25,-5.4 90 top  (outside the outline)
R119  10K  [M0805]  125.52,-11.27 0 bottom  (outside the outline)
R120  10K  [M0805]  138.53,-14.13 0 bottom  (outside the outline)
R121  510  [M0805]  179.33,35.56 180 top  (outside the outline)
R122  510  [M0805]  179.33,32.54 180 top  (outside the outline)
R123  75  [M0805]  148.38,-8.57 0 top  (outside the outline)
R124  75  [M0805]  148.38,-10.64 0 top  (outside the outline)
R125  75  [M0805]  148.38,-12.7 0 top  (outside the outline)
R126  75  [M0805]  158.38,26.99 180 top  (outside the outline)
R127  10K  [M0805]  122.82,0.73 270 top  (outside the outline)
R128  10K  [M0805]  109.61,13.3 180 top  (outside the outline)
RGB  RGB  [53048-09]  44.42,-18.1 180 top  (outside the outline)
RGB1  RGB  [53048-09]  44.42,55.88 180 top
RGB2  RGB  [53048-09]  148.44,55.88 180 top  (outside the outline)
RGB3  RGB  [53048-09]  148.44,-18.1 180 top  (outside the outline)
RST  [1X02]  22.76,23.81 315 top
RST1  [1X02]  22.76,97.79 315 top
RST2  [1X02]  126.79,97.79 315 top  (outside the outline)
RST3  [1X02]  126.79,23.81 315 top  (outside the outline)
SDCARD  [SDCMF-10915W010]  3.56,11.43 90 bottom
SDCARD1  [SDCMF-10915W010]  3.56,85.41 90 bottom
SDCARD2  [SDCMF-10915W010]  107.58,85.41 90 bottom
SDCARD3  [SDCMF-10915W010]  107.58,11.43 90 bottom
T1  BC846  [SOT23]  51.02,-6.51 0 top  (outside the outline)
T2  BC846  [SOT23]  51.02,67.47 0 top
T3  BC846  [SOT23]  155.04,67.47 0 top  (outside the outline)
T4  BC846  [SOT23]  155.04,-6.51 0 top  (outside the outline)
U1  6SLX9TQG144  [TQ144]  41.34,11.43 270 top
U2  FLASH-SPI-25XXSMD1  [SO08-EIAJ]  22.92,6.83 0 top
U3  [TSOP44-II]  62.93,11.67 270 top
U4  AD724  [SO16W]  20.38,-6.83 90 top
U5  50MHz  [SM/OSC_1PRIMARY]  43.8,9.37 180 bottom
U6  3.3V  [SOT223]  6.41,2.86 0 top
U7  1.2V  [SOT223]  14.16,11.43 0 top
U8  6SLX9TQG144  [TQ144]  41.34,85.41 270 top
U9  [TSOP44-II]  62.93,85.65 270 top
U10  FLASH-SPI-25XXSMD1  [SO08-EIAJ]  22.92,80.8 0 top
U11  3.3V  [SOT223]  6.41,76.84 0 top
U12  1.2V  [SOT223]  14.16,85.41 0 top
U13  AD724  [SO16W]  20.38,67.15 90 top
U14  50MHz  [SM/OSC_1PRIMARY]  43.8,83.34 180 bottom
U15  6SLX9TQG144  [TQ144]  145.36,85.41 270 top  (outside the outline)
U16  [TSOP44-II]  166.95,85.65 270 top  (outside the outline)
U17  FLASH-SPI-25XXSMD1  [SO08-EIAJ]  126.94,80.8 0 top  (outside the outline)
U18  3.3V  [SOT223]  110.43,76.84 0 top  (outside the outline)
U19  1.2V  [SOT223]  118.18,85.41 0 top  (outside the outline)
U20  AD724  [SO16W]  124.4,67.15 90 top  (outside the outline)
U21  50MHz  [SM/OSC_1PRIMARY]  147.82,83.34 180 bottom  (outside the outline)
U22  6SLX9TQG144  [TQ144]  145.36,11.43 270 top  (outside the outline)
U23  [TSOP44-II]  166.95,11.67 270 top  (outside the outline)
U24  FLASH-SPI-25XXSMD1  [SO08-EIAJ]  126.94,6.83 0 top  (outside the outline)
U25  3.3V  [SOT223]  110.43,2.86 0 top  (outside the outline)
U26  1.2V  [SOT223]  118.18,11.43 0 top  (outside the outline)
U27  AD724  [SO16W]  124.4,-6.83 90 top  (outside the outline)
U28  50MHz  [SM/OSC_1PRIMARY]  147.82,9.37 180 bottom  (outside the outline)
Y1  3.58M  [HC49UP]  13.72,-16.03 0 top  (outside the outline)
Y2  4.43M  [HC49UP]  29.11,-16.03 180 top  (outside the outline)
Y3  3.58M  [HC49UP]  13.72,57.94 0 top
Y4  4.43M  [HC49UP]  29.11,57.94 180 top
Y5  3.58M  [HC49UP]  117.74,57.94 0 top  (outside the outline)
Y6  4.43M  [HC49UP]  133.14,57.94 180 top  (outside the outline)
Y7  3.58M  [HC49UP]  117.74,-16.03 0 top  (outside the outline)
Y8  4.43M  [HC49UP]  133.14,-16.03 180 top  (outside the outline)

## Library data of the parts
AUDIO AUDIO1-AUDIO3 EAR EAR1-EAR3 JOY JOY1-JOY3 = SparkFun-Connectors
C1-C144 L1-L12 R1-R128 = rcl
CVBS CVBS1-CVBS3 = uzebox
D1-D3 D8-D10 D13-D15 D18-D20 E$1 E$2 = adafruit
D4-D7 D11 D12 D16 D17 = led
H1-H4 = holes
J1-J16 PWCON PWCON1-PWCON3 PWSW PWSW1-PWSW3 RST RST1-RST3 = pinhead
JTAG JTAG1-JTAG3 = con-molex; MPN: 53047-0610-C; OC_FARNELL: 9733078; OC_NEWARK: 03M2965
PS/1-PS/4 = ZX_UNO_0_14
PWUSB PWUSB1-PWUSB3 SDCARD SDCARD1-SDCARD3 = zxuno_rev_mcleod
RGB RGB1-RGB3 = con-molex; MPN: 53048-0910; OC_FARNELL: 1012239; OC_NEWARK: 98K9837
T1-T4 = transistor
U1 U8 U15 U22 = xilinx_devices_V6
U2 U3 U9 U10 U16 U17 U23 U24 = GadgetFactory
U4 U13 U20 U27 = ad725
U5 U14 U21 U28 = ZX_UNO_0_15
U6 U7 U11 U12 U18 U19 U25 U26 = burr-brown; MPN: REG1117; OC_FARNELL: 1097566; OC_NEWARK: 14P6981
Y1-Y8 = crystal; OC_FARNELL: unknown; OC_NEWARK: unknown

## Nets
1.2V: C9.2 C10.2 C11.2 C12.2 C13.2 L2.2 U1.P19 U1.P28 U1.P52 U1.P89 U1.P128
1.2V1: C39.2 C40.2 C41.2 C42.2 C43.2 L6.2 U8.P19 U8.P28 U8.P52 U8.P89 U8.P128
1.2V2: C75.2 C76.2 C77.2 C78.2 C79.2 L9.2 U15.P19 U15.P28 U15.P52 U15.P89 U15.P128
1.2V3: C111.2 C112.2 C113.2 C114.2 C115.2 L12.2 U22.P19 U22.P28 U22.P52 U22.P89 U22.P128
3.3V: C14.2 C15.2 C16.2 C17.2 C18.2 C19.2 C20.2 C21.2 C22.2 C23.2 C24.2 C25.2 C26.1 C27.2 J11.1 J12.12 JTAG.1 L1.2 R24.2 R27.2 R30.1 R31.2 R32.2 RGB.4 SDCARD.4 U1.P4 U1.P18 U1.P20 U1.P31 U1.P36 U1.P42 U1.P53 U1.P63 U1.P69 U1.P76 U1.P86 U1.P90 U1.P103 U1.P122 U1.P125 U1.P129 U1.P135 U2.8 U3.11 U3.33 U5.4
3.3V1: C37.1 C38.2 C44.2 C45.2 C46.2 C47.2 C48.2 C49.2 C50.2 C51.2 C52.2 C53.2 C54.2 C55.2 J1.12 J2.1 JTAG1.1 L5.2 R37.2 R38.2 R44.1 R63.2 R64.2 RGB1.4 SDCARD1.4 U8.P4 U8.P18 U8.P20 U8.P31 U8.P36 U8.P42 U8.P53 U8.P63 U8.P69 U8.P76 U8.P86 U8.P90 U8.P103 U8.P122 U8.P125 U8.P129 U8.P135 U9.11 U9.33 U10.8 U14.4
3.3V2: C73.1 C74.2 C80.2 C81.2 C82.2 C83.2 C84.2 C85.2 C86.2 C87.2 C88.2 C89.2 C90.2 C91.2 J5.12 J6.1 JTAG2.1 L8.2 R69.2 R70.2 R76.1 R95.2 R96.2 RGB2.4 SDCARD2.4 U15.P4 U15.P18 U15.P20 U15.P31 U15.P36 U15.P42 U15.P53 U15.P63 U15.P69 U15.P76 U15.P86 U15.P90 U15.P103 U15.P122 U15.P125 U15.P129 U15.P135 U16.11 U16.33 U17.8 U21.4
3.3V3: C109.1 C110.2 C116.2 C117.2 C118.2 C119.2 C120.2 C121.2 C122.2 C123.2 C124.2 C125.2 C126.2 C127.2 J9.12 J13.1 JTAG3.1 L11.2 R101.2 R102.2 R108.1 R127.2 R128.2 RGB3.4 SDCARD3.4 U22.P4 U22.P18 U22.P20 U22.P31 U22.P36 U22.P42 U22.P53 U22.P63 U22.P69 U22.P76 U22.P86 U22.P90 U22.P103 U22.P122 U22.P125 U22.P129 U22.P135 U23.11 U23.33 U24.8 U28.4
5V: C28.1 C30.1 C32.2 C33.2 J12.1 L3.2 PS/2.4 R5.1 R7.2 U4.4 U4.5 U4.14 U4.15 U6.3 U7.3
5V1: C62.1 C64.1 C71.2 C72.2 J1.1 L4.2 PS/1.4 R45.1 R58.2 U11.3 U12.3 U13.4 U13.5 U13.14 U13.15
5V2: C98.1 C100.1 C107.2 C108.2 J5.1 L7.2 PS/3.4 R77.1 R90.2 U18.3 U19.3 U20.4 U20.5 U20.14 U20.15
5V3: C134.1 C136.1 C143.2 C144.2 J9.1 L10.2 PS/4.4 R109.1 R122.2 U25.3 U26.3 U27.4 U27.5 U27.14 U27.15
AUDIO_LEFT: R22.2 U1.P10
AUDIO_LEFT1: R42.2 U8.P10
AUDIO_LEFT2: R74.2 U15.P10
AUDIO_LEFT3: R106.2 U22.P10
AUDIO_RIGHT: R23.2 U1.P9
AUDIO_RIGHT1: R43.2 U8.P9
AUDIO_RIGHT2: R75.2 U15.P9
AUDIO_RIGHT3: R107.2 U22.P9
B: C8.2 R3.1 R14.1 R18.1 R21.1 RGB.7
B0: R21.2 U1.P88
B1: R18.2 U1.P92
B2: R14.2 U1.P93
B3: R54.2 U8.P88
B4: R53.2 U8.P92
B5: R52.2 U8.P93
B6: C68.2 R52.1 R53.1 R54.1 R61.1 RGB1.7
B7: R86.2 U15.P88
B8: R85.2 U15.P92
B9: R84.2 U15.P93
B10: C104.2 R84.1 R85.1 R86.1 R93.1 RGB2.7
B11: R118.2 U22.P88
B12: R117.2 U22.P92
B13: R116.2 U22.P93
B14: C140.2 R116.1 R117.1 R118.1 R125.1 RGB3.7
CLK: U1.P55 U5.3
CLK1: U8.P55 U14.3
CLK2: U15.P55 U21.3
CLK3: U22.P55 U28.3
CSYNC: RGB.3 U1.P87 U4.16
CSYNC1: RGB1.3 U8.P87 U13.16
CSYNC2: RGB2.3 U15.P87 U20.16
CSYNC3: RGB3.3 U22.P87 U27.16
EAR: R27.1 T1.3 U1.P94
EAR1: R38.1 T2.3 U8.P94
EAR2: R70.1 T3.3 U15.P94
EAR3: R102.1 T4.3 U22.P94
EXT1: J1.2 U8.P57
EXT2: J2.2 U8.P56
EXT3: J3.2 U8.P51
EXT4: J1.3 U8.P50
EXT5: J2.3 U8.P48
EXT6: J10.1 U1.P58
EXT7: J12.2 U1.P57
EXT8: J11.2 U1.P56
EXT9: J10.2 U1.P51
EXT10: J12.3 U1.P50
EXT11: J11.3 U1.P48
EXT12: J10.3 U1.P47
EXT13: J12.4 U1.P46
EXT14: J11.4 U1.P45
EXT15: J10.4 U1.P44
EXT16: J12.5 U1.P43
EXT17: J11.5 U1.P41
EXT18: J10.5 U1.P40
EXT19: J12.6 U1.P35
EXT20: J11.6 U1.P34
EXT21: J10.6 U1.P33
EXT22: J12.7 U1.P32
EXT23: J11.7 U1.P30
EXT24: J10.7 U1.P29
EXT25: J12.8 U1.P27
EXT26: J11.8 U1.P26
EXT27: J10.8 U1.P24
EXT28: J12.9 U1.P23
EXT29: J11.9 U1.P22
EXT30: J10.9 U1.P21
EXT31: J12.10 U1.P17
EXT32: J11.10 U1.P16
EXT33: J10.10 U1.P15
EXT34: J12.11 U1.P14
EXT35: J11.11 U1.P12
EXT36: J3.3 U8.P47
EXT37: J1.4 U8.P46
EXT38: J2.4 U8.P45
EXT39: J3.4 U8.P44
EXT40: J1.5 U8.P43
EXT41: J2.5 U8.P41
EXT42: J3.5 U8.P40
EXT43: J1.6 U8.P35
EXT44: J2.6 U8.P34
EXT45: J3.6 U8.P33
EXT46: J1.7 U8.P32
EXT47: J2.7 U8.P30
EXT48: J3.7 U8.P29
EXT49: J1.8 U8.P27
EXT50: J2.8 U8.P26
EXT51: J3.8 U8.P24
EXT52: J1.9 U8.P23
EXT53: J2.9 U8.P22
EXT54: J3.9 U8.P21
EXT55: J1.10 U8.P17
EXT56: J2.10 U8.P16
EXT57: J3.10 U8.P15
EXT58: J1.11 U8.P14
EXT59: J2.11 U8.P12
EXT60: J3.1 U8.P58
EXT61: J5.2 U15.P57
EXT62: J6.2 U15.P56
EXT63: J7.2 U15.P51
EXT64: J5.3 U15.P50
EXT65: J6.3 U15.P48
EXT66: J7.3 U15.P47
EXT67: J5.4 U15.P46
EXT68: J6.4 U15.P45
EXT69: J7.4 U15.P44
EXT70: J5.5 U15.P43
EXT71: J6.5 U15.P41
EXT72: J7.5 U15.P40
EXT73: J5.6 U15.P35
EXT74: J6.6 U15.P34
EXT75: J7.6 U15.P33
EXT76: J5.7 U15.P32
EXT77: J6.7 U15.P30
EXT78: J7.7 U15.P29
EXT79: J5.8 U15.P27
EXT80: J6.8 U15.P26
EXT81: J7.8 U15.P24
EXT82: J5.9 U15.P23
EXT83: J6.9 U15.P22
EXT84: J7.9 U15.P21
EXT85: J5.10 U15.P17
EXT86: J6.10 U15.P16
EXT87: J7.10 U15.P15
EXT88: J5.11 U15.P14
EXT89: J6.11 U15.P12
EXT90: J7.1 U15.P58
EXT91: J9.2 U22.P57
EXT92: J13.2 U22.P56
EXT93: J14.2 U22.P51
EXT94: J9.3 U22.P50
EXT95: J13.3 U22.P48
EXT96: J14.3 U22.P47
EXT97: J9.4 U22.P46
EXT98: J13.4 U22.P45
EXT99: J14.4 U22.P44
EXT100: J9.5 U22.P43
EXT101: J13.5 U22.P41
EXT102: J14.5 U22.P40
EXT103: J9.6 U22.P35
EXT104: J13.6 U22.P34
EXT105: J14.6 U22.P33
EXT106: J9.7 U22.P32
EXT107: J13.7 U22.P30
EXT108: J14.7 U22.P29
EXT109: J9.8 U22.P27
EXT110: J13.8 U22.P26
EXT111: J14.8 U22.P24
EXT112: J9.9 U22.P23
EXT113: J13.9 U22.P22
EXT114: J14.9 U22.P21
EXT115: J9.10 U22.P17
EXT116: J13.10 U22.P16
EXT117: J14.10 U22.P15
EXT118: J9.11 U22.P14
EXT119: J13.11 U22.P12
EXT120: J14.1 U22.P58
FLASH_CS: U1.P38 U2.1
FLASH_CS1: U8.P38 U10.1
FLASH_CS2: U15.P38 U17.1
FLASH_CS3: U22.P38 U24.1
FLASH_HOLD: U1.P61 U2.7
FLASH_HOLD1: U8.P61 U10.7
FLASH_HOLD2: U15.P61 U17.7
FLASH_HOLD3: U22.P61 U24.7
FLASH_MISO: U1.P65 U2.2
FLASH_MISO1: U8.P65 U10.2
FLASH_MISO2: U15.P65 U17.2
FLASH_MISO3: U22.P65 U24.2
FLASH_MOSI: U1.P64 U2.5
FLASH_MOSI1: U8.P64 U10.5
FLASH_MOSI2: U15.P64 U17.5
FLASH_MOSI3: U22.P64 U24.5
FLASH_SCK: U1.P70 U2.6
FLASH_SCK1: U8.P70 U10.6
FLASH_SCK2: U15.P70 U17.6
FLASH_SCK3: U22.P70 U24.6
FLASH_WP: U1.P62 U2.3
FLASH_WP1: U8.P62 U10.3
FLASH_WP2: U15.P62 U17.3
FLASH_WP3: U22.P62 U24.3
G: C7.2 R2.1 R13.1 R17.1 R20.1 RGB.6
G0: R20.2 U1.P82
G1: R17.2 U1.P83
G2: R13.2 U1.P84
G3: R51.2 U8.P82
G4: R50.2 U8.P83
G5: R49.2 U8.P84
G6: C67.2 R49.1 R50.1 R51.1 R60.1 RGB1.6
G7: R83.2 U15.P82
G8: R82.2 U15.P83
G9: R81.2 U15.P84
G10: C103.2 R81.1 R82.1 R83.1 R92.1 RGB2.6
G11: R115.2 U22.P82
G12: R114.2 U22.P83
G13: R113.2 U22.P84
G14: C139.2 R113.1 R114.1 R115.1 R124.1 RGB3.6
GND: AUDIO.SLEEVE C1.2 C2.2 C3.2 C4.2 C9.1 C10.1 C11.1 C12.1 C13.1 C14.1 C15.1 C16.1 C17.1 C18.1 C19.1 C20.1 C21.1 C22.1 C23.1 C24.1 C25.1 C26.2 C27.1 C28.2 C29.2 C30.2 C31.2 C32.1 C33.1 CVBS.GND D1.A D2.C D3.C D4.C D5.C EAR.SLEEVE J10.12 J11.12 JOY.8 JTAG.2 PS/2.3 PWCON.1 PWUSB.5 R1.2 R2.2 R3.2 R29.2 RGB.1 RST.1 SDCARD.3 SDCARD.6 SDCARD.M1 SDCARD.M2 SDCARD.M3 SDCARD.M4 T1.2 U1.P3 U1.P13 U1.P25 U1.P49 U1.P54 U1.P60 U1.P68 U1.P73 U1.P77 U1.P91 U1.P96 U1.P108 U1.P113 U1.P130 U1.P136 U1.P144 U2.4 U3.8 U3.12 U3.34 U3.37 U4.2 U4.12 U4.13 U5.2 U6.1 U7.1
GND1: AUDIO1.SLEEVE C37.2 C38.1 C39.1 C40.1 C41.1 C42.1 C43.1 C44.1 C45.1 C46.1 C47.1 C48.1 C49.1 C50.1 C51.1 C52.1 C53.1 C54.1 C55.1 C56.2 C58.2 C59.2 C62.2 C63.2 C64.2 C65.2 C69.2 C71.1 C72.1 CVBS1.GND D6.C D7.C D8.A D9.C D10.C EAR1.SLEEVE J2.12 J3.12 JOY1.8 JTAG1.2 PS/1.3 PWCON1.1 PWUSB1.5 R41.2 R59.2 R60.2 R61.2 RGB1.1 RST1.1 SDCARD1.3 SDCARD1.6 SDCARD1.M1 SDCARD1.M2 SDCARD1.M3 SDCARD1.M4 T2.2 U8.P3 U8.P13 U8.P25 U8.P49 U8.P54 U8.P60 U8.P68 U8.P73 U8.P77 U8.P91 U8.P96 U8.P108 U8.P113 U8.P130 U8.P136 U8.P144 U9.8 U9.12 U9.34 U9.37 U10.4 U11.1 U12.1 U13.2 U13.12 U13.13 U14.2
GND2: AUDIO2.SLEEVE C73.2 C74.1 C75.1 C76.1 C77.1 C78.1 C79.1 C80.1 C81.1 C82.1 C83.1 C84.1 C85.1 C86.1 C87.1 C88.1 C89.1 C90.1 C91.1 C92.2 C94.2 C95.2 C98.2 C99.2 C100.2 C101.2 C105.2 C107.1 C108.1 CVBS2.GND D11.C D12.C D13.A D14.C D15.C EAR2.SLEEVE J6.12 J7.12 JOY2.8 JTAG2.2 PS/3.3 PWCON2.1 PWUSB2.5 R73.2 R91.2 R92.2 R93.2 RGB2.1 RST2.1 SDCARD2.3 SDCARD2.6 SDCARD2.M1 SDCARD2.M2 SDCARD2.M3 SDCARD2.M4 T3.2 U15.P3 U15.P13 U15.P25 U15.P49 U15.P54 U15.P60 U15.P68 U15.P73 U15.P77 U15.P91 U15.P96 U15.P108 U15.P113 U15.P130 U15.P136 U15.P144 U16.8 U16.12 U16.34 U16.37 U17.4 U18.1 U19.1 U20.2 U20.12 U20.13 U21.2
GND3: AUDIO3.SLEEVE C109.2 C110.1 C111.1 C112.1 C113.1 C114.1 C115.1 C116.1 C117.1 C118.1 C119.1 C120.1 C121.1 C122.1 C123.1 C124.1 C125.1 C126.1 C127.1 C128.2 C130.2 C131.2 C134.2 C135.2 C136.2 C137.2 C141.2 C143.1 C144.1 CVBS3.GND D16.C D17.C D18.A D19.C D20.C EAR3.SLEEVE J13.12 J14.12 JOY3.8 JTAG3.2 PS/4.3 PWCON3.1 PWUSB3.5 R105.2 R123.2 R124.2 R125.2 RGB3.1 RST3.1 SDCARD3.3 SDCARD3.6 SDCARD3.M1 SDCARD3.M2 SDCARD3.M3 SDCARD3.M4 T4.2 U22.P3 U22.P13 U22.P25 U22.P49 U22.P54 U22.P60 U22.P68 U22.P73 U22.P77 U22.P91 U22.P96 U22.P108 U22.P113 U22.P130 U22.P136 U22.P144 U23.8 U23.12 U23.34 U23.37 U24.4 U25.1 U26.1 U27.2 U27.12 U27.13 U28.2
JOY_DOWN: JOY.2 U1.P5
JOY_DOWN1: JOY1.2 U8.P5
JOY_DOWN2: JOY2.2 U15.P5
JOY_DOWN3: JOY3.2 U22.P5
JOY_FIRE1: JOY.6 U1.P2
JOY_FIRE2: JOY.9 U1.P8
JOY_FIRE3: J16.1 U1.P39
JOY_FIRE4: JOY1.6 U8.P2
JOY_FIRE5: JOY1.9 U8.P8
JOY_FIRE6: J4.1 U8.P39
JOY_FIRE7: JOY2.6 U15.P2
JOY_FIRE8: JOY2.9 U15.P8
JOY_FIRE9: J8.1 U15.P39
JOY_FIRE10: JOY3.6 U22.P2
JOY_FIRE11: JOY3.9 U22.P8
JOY_FIRE12: J15.1 U22.P39
JOY_LEFT: JOY.3 U1.P6
JOY_LEFT1: JOY1.3 U8.P6
JOY_LEFT2: JOY2.3 U15.P6
JOY_LEFT3: JOY3.3 U22.P6
JOY_RIGHT: JOY.4 U1.P7
JOY_RIGHT1: JOY1.4 U8.P7
JOY_RIGHT2: JOY2.4 U15.P7
JOY_RIGHT3: JOY3.4 U22.P7
JOY_UP: JOY.1 U1.P1
JOY_UP1: JOY1.1 U8.P1
JOY_UP2: JOY2.1 U15.P1
JOY_UP3: JOY3.1 U22.P1
L-OUT: AUDIO.TIP C34.2 RGB.9
L-OUT1: AUDIO1.TIP C60.2 RGB1.9
L-OUT2: AUDIO2.TIP C96.2 RGB2.9
L-OUT3: AUDIO3.TIP C132.2 RGB3.9
LED: R6.2 U1.P11
LED1: R57.2 U8.P11
LED2: R89.2 U15.P11
LED3: R121.2 U22.P11
N$1: PS/2.6 R11.1
N$2: PS/2.5 R10.1
N$3: PS/2.2 R9.1
N$4: PS/2.1 R8.1
N$5: R24.1 RST.2 U1.P37
N$6: R28.2 T1.1
N$7: C2.1 C5.1 D1.C R28.1
N$8: C5.2 R15.2
N$9: EAR.TIP R15.1 R29.1
N$10: C3.1 C35.1 R23.1
N$11: C4.1 C34.1 R22.1
N$12: PWCON.2 PWSW.2 PWUSB.1
N$13: L3.1 PWSW.1
N$14: C29.1 L1.1 U6.2
N$15: J16.4 R5.2
N$16: PS/1.6 R33.1
N$17: C31.1 L2.1 U7.2
N$18: R31.1 SDCARD.8
N$19: C8.1 U4.8
N$20: R32.1 SDCARD.9
N$21: C7.1 U4.7
N$22: C6.1 U4.6
N$23: C1.1 U4.3 Y1.2 Y2.2
N$24: D3.A R26.1 Y2.1
N$25: D2.A R25.2 Y1.1
N$26: C36.+ U4.10
N$27: C36.- R4.1
N$28: CVBS.SIG R4.2
N$29: PS/1.5 R34.1
N$30: PS/1.2 R35.1
N$31: D4.A R6.1
N$32: D5.A R7.1
N$33: PS/1.1 R36.1
N$34: R39.2 T2.1
N$35: C56.1 C57.1 D8.C R39.1
N$36: C57.2 R40.2
N$37: EAR1.TIP R40.1 R41.1
N$38: C58.1 C61.1 R43.1
N$39: C59.1 C60.1 R42.1
N$40: PWCON1.2 PWSW1.2 PWUSB1.1
N$41: L4.1 PWSW1.1
N$42: C63.1 L5.1 U11.2
N$43: C65.1 L6.1 U12.2
N$44: C67.1 U13.7
N$45: C66.1 U13.6
N$46: C69.1 U13.3 Y3.2 Y4.2
N$47: D10.A R56.1 Y4.1
N$48: D9.A R55.2 Y3.1
N$49: C70.+ U13.10
N$50: C68.1 U13.8
N$51: C70.- R62.1
N$52: CVBS1.SIG R62.2
N$53: D6.A R57.1
N$54: D7.A R58.1
N$55: R37.1 RST1.2 U8.P37
N$56: R63.1 SDCARD1.8
N$57: R64.1 SDCARD1.9
N$58: J4.4 R45.2
N$59: PS/3.6 R65.1
N$60: PS/3.5 R66.1
N$61: PS/3.2 R67.1
N$62: PS/3.1 R68.1
N$63: R71.2 T3.1
N$64: C92.1 C93.1 D13.C R71.1
N$65: C93.2 R72.2
N$66: EAR2.TIP R72.1 R73.1
N$67: C94.1 C97.1 R75.1
N$68: C95.1 C96.1 R74.1
N$69: PWCON2.2 PWSW2.2 PWUSB2.1
N$70: L7.1 PWSW2.1
N$71: C99.1 L8.1 U18.2
N$72: C101.1 L9.1 U19.2
N$73: C103.1 U20.7
N$74: C102.1 U20.6
N$75: C105.1 U20.3 Y5.2 Y6.2
N$76: D15.A R88.1 Y6.1
N$77: D14.A R87.2 Y5.1
N$78: C106.+ U20.10
N$79: C104.1 U20.8
N$80: C106.- R94.1
N$81: CVBS2.SIG R94.2
N$82: D11.A R89.1
N$83: D12.A R90.1
N$84: R69.1 RST2.2 U15.P37
N$85: R95.1 SDCARD2.8
N$86: R96.1 SDCARD2.9
N$87: J8.4 R77.2
N$88: PS/4.6 R97.1
N$89: PS/4.5 R98.1
N$90: PS/4.2 R99.1
N$91: PS/4.1 R100.1
N$92: R103.2 T4.1
N$93: C128.1 C129.1 D18.C R103.1
N$94: C129.2 R104.2
N$95: EAR3.TIP R104.1 R105.1
N$96: C130.1 C133.1 R107.1
N$97: C131.1 C132.1 R106.1
N$98: PWCON3.2 PWSW3.2 PWUSB3.1
N$99: L10.1 PWSW3.1
N$100: C135.1 L11.1 U25.2
N$101: C137.1 L12.1 U26.2
N$102: C139.1 U27.7
N$103: C138.1 U27.6
N$104: C141.1 U27.3 Y7.2 Y8.2
N$105: D20.A R120.1 Y8.1
N$106: D19.A R119.2 Y7.1
N$107: C142.+ U27.10
N$108: C140.1 U27.8
N$109: C142.- R126.1
N$110: CVBS3.SIG R126.2
N$111: D16.A R121.1
N$112: D17.A R122.1
N$113: R101.1 RST3.2 U22.P37
N$114: R127.1 SDCARD3.8
N$115: R128.1 SDCARD3.9
N$116: J15.4 R109.2
PIN1: J4.3 JOY1.7
PIN2: J4.2 JOY1.5
PIN3: J8.3 JOY2.7
PIN4: J8.2 JOY2.5
PIN5: J16.2 JOY.5
PIN6: J15.3 JOY3.7
PIN7: J16.3 JOY.7
PIN8: J15.2 JOY3.5
PS2_CLK: R10.2 U1.P99
PS2_CLK1: R34.2 U8.P99
PS2_CLK2: R66.2 U15.P99
PS2_CLK3: R98.2 U22.P99
PS2_DATA: R8.2 U1.P98
PS2_DATA1: R36.2 U8.P98
PS2_DATA2: R68.2 U15.P98
PS2_DATA3: R100.2 U22.P98
PS2_PIN1: R33.2 U8.P95
PS2_PIN2: R9.2 U1.P97
PS2_PIN3: R35.2 U8.P97
PS2_PIN4: R65.2 U15.P95
PS2_PIN5: R67.2 U15.P97
PS2_PIN6: R11.2 U1.P95
PS2_PIN7: R97.2 U22.P95
PS2_PIN8: R99.2 U22.P97
R: C6.2 R1.1 R12.1 R16.1 R19.1 RGB.5
R0: R19.2 U1.P79
R1: R16.2 U1.P80
R2: R12.2 U1.P81
R3: R48.2 U8.P79
R4: R47.2 U8.P80
R5: R46.2 U8.P81
R6: C66.2 R46.1 R47.1 R48.1 R59.1 RGB1.5
R7: R80.2 U15.P79
R8: R79.2 U15.P80
R9: R78.2 U15.P81
R10: C102.2 R78.1 R79.1 R80.1 R91.1 RGB2.5
R11: R112.2 U22.P79
R12: R111.2 U22.P80
R13: R110.2 U22.P81
R14: C138.2 R110.1 R111.1 R112.1 R123.1 RGB3.5
R-OUT: AUDIO.RING C35.2 RGB.8
R-OUT1: AUDIO1.RING C61.2 RGB1.8
R-OUT2: AUDIO2.RING C97.2 RGB2.8
R-OUT3: AUDIO3.RING C133.2 RGB3.8
SD_CS: SDCARD.1 U1.P59
SD_CS1: SDCARD1.1 U8.P59
SD_CS2: SDCARD2.1 U15.P59
SD_CS3: SDCARD3.1 U22.P59
SD_MISO: R30.2 SDCARD.7 U1.P78
SD_MISO1: R44.2 SDCARD1.7 U8.P78
SD_MISO2: R76.2 SDCARD2.7 U15.P78
SD_MISO3: R108.2 SDCARD3.7 U22.P78
SD_MOSI: SDCARD.2 U1.P74
SD_MOSI1: SDCARD1.2 U8.P74
SD_MOSI2: SDCARD2.2 U15.P74
SD_MOSI3: SDCARD3.2 U22.P74
SD_SCK: SDCARD.5 U1.P75
SD_SCK1: SDCARD1.5 U8.P75
SD_SCK2: SDCARD2.5 U15.P75
SD_SCK3: SDCARD3.5 U22.P75
STDN: R25.1 U1.P66 U4.1
STDN1: R55.1 U8.P66 U13.1
STDN2: R87.1 U15.P66 U20.1
STDN3: R119.1 U22.P66 U27.1
STDNB: R26.2 U1.P67
STDNB1: R56.2 U8.P67
STDNB2: R88.2 U15.P67
STDNB3: R120.2 U22.P67
TCK: JTAG.3 U1.P109
TCK1: JTAG1.3 U8.P109
TCK2: JTAG2.3 U15.P109
TCK3: JTAG3.3 U22.P109
TDI: JTAG.5 U1.P110
TDI1: JTAG1.5 U8.P110
TDI2: JTAG2.5 U15.P110
TDI3: JTAG3.5 U22.P110
TDO: JTAG.4 U1.P106
TDO1: JTAG1.4 U8.P106
TDO2: JTAG2.4 U15.P106
TDO3: JTAG3.4 U22.P106
TMS: JTAG.6 U1.P107
TMS1: JTAG1.6 U8.P107
TMS2: JTAG2.6 U15.P107
TMS3: JTAG3.6 U22.P107
VSYNC: RGB.2 U1.P85
VSYNC1: RGB1.2 U8.P85
VSYNC2: RGB2.2 U15.P85
VSYNC3: RGB3.2 U22.P85
WR: U1.P121 U3.15
WR1: U8.P121 U9.15
WR2: U15.P121 U16.15
WR3: U22.P121 U23.15
XA0: U1.P141 U3.3
XA1: U1.P139 U3.4
XA2: U1.P137 U3.5
XA3: U1.P134 U3.6
XA4: U1.P133 U3.7
XA5: U1.P120 U3.16
XA6: U1.P118 U3.17
XA7: U1.P116 U3.18
XA8: U1.P114 U3.19
XA9: U1.P112 U3.20
XA10: U1.P104 U3.26
XA11: U1.P102 U3.27
XA12: U1.P101 U3.28
XA13: U1.P100 U3.29
XA14: U1.P111 U3.30
XA15: U1.P131 U3.38
XA16: U1.P138 U3.39
XA17: U1.P140 U3.40
XA18: U1.P142 U3.41
XA19: U1.P105 U3.25
XA20: U1.P143 U3.42
XA21: U8.P141 U9.3
XA22: U8.P137 U9.5
XA23: U8.P134 U9.6
XA24: U8.P133 U9.7
XA25: U8.P120 U9.16
XA26: U8.P118 U9.17
XA27: U8.P116 U9.18
XA28: U8.P114 U9.19
XA29: U8.P112 U9.20
XA30: U8.P104 U9.26
XA31: U8.P102 U9.27
XA32: U8.P101 U9.28
XA33: U8.P100 U9.29
XA34: U8.P111 U9.30
XA35: U8.P131 U9.38
XA36: U8.P138 U9.39
XA37: U8.P140 U9.40
XA38: U8.P142 U9.41
XA39: U8.P105 U9.25
XA40: U8.P143 U9.42
XA41: U8.P139 U9.4
XA42: U15.P141 U16.3
XA43: U15.P137 U16.5
XA44: U15.P134 U16.6
XA45: U15.P133 U16.7
XA46: U15.P120 U16.16
XA47: U15.P118 U16.17
XA48: U15.P116 U16.18
XA49: U15.P114 U16.19
XA50: U15.P112 U16.20
XA51: U15.P104 U16.26
XA52: U15.P102 U16.27
XA53: U15.P101 U16.28
XA54: U15.P100 U16.29
XA55: U15.P111 U16.30
XA56: U15.P131 U16.38
XA57: U15.P138 U16.39
XA58: U15.P140 U16.40
XA59: U15.P142 U16.41
XA60: U15.P105 U16.25
XA61: U15.P143 U16.42
XA62: U15.P139 U16.4
XA63: U22.P141 U23.3
XA64: U22.P137 U23.5
XA65: U22.P134 U23.6
XA66: U22.P133 U23.7
XA67: U22.P120 U23.16
XA68: U22.P118 U23.17
XA69: U22.P116 U23.18
XA70: U22.P114 U23.19
XA71: U22.P112 U23.20
XA72: U22.P104 U23.26
XA73: U22.P102 U23.27
XA74: U22.P101 U23.28
XA75: U22.P100 U23.29
XA76: U22.P111 U23.30
XA77: U22.P131 U23.38
XA78: U22.P138 U23.39
XA79: U22.P140 U23.40
XA80: U22.P142 U23.41
XA81: U22.P105 U23.25
XA82: U22.P143 U23.42
XA83: U22.P139 U23.4
XD0: U1.P132 U3.9
XD1: U1.P127 U3.10
XD2: U1.P124 U3.13
XD3: U1.P123 U3.14
XD4: U1.P115 U3.31
XD5: U1.P117 U3.32
XD6: U1.P119 U3.35
XD7: U1.P126 U3.36
XD8: U8.P132 U9.9
XD9: U8.P127 U9.10
XD10: U8.P124 U9.13
XD11: U8.P123 U9.14
XD12: U8.P115 U9.31
XD13: U8.P117 U9.32
XD14: U8.P119 U9.35
XD15: U8.P126 U9.36
XD16: U15.P132 U16.9
XD17: U15.P127 U16.10
XD18: U15.P124 U16.13
XD19: U15.P123 U16.14
XD20: U15.P115 U16.31
XD21: U15.P117 U16.32
XD22: U15.P119 U16.35
XD23: U15.P126 U16.36
XD24: U22.P132 U23.9
XD25: U22.P127 U23.10
XD26: U22.P124 U23.13
XD27: U22.P123 U23.14
XD28: U22.P115 U23.31
XD29: U22.P117 U23.32
XD30: U22.P119 U23.35
XD31: U22.P126 U23.36

## Tracks (layer width: path | path; a pad name or v marks a point on that pad's centre or on a via)
1.2V  (via drill 0.3 pad 0.66)  (3 unrouted)
  Top 0.178: U1.P28 36.57,21.38 | 41.11,21.54 41.13,21.54 | 41.93,20.74 41.13,21.54 | U1.P19 41.09,21.58 41.13,21.54 | U1.P128 51.02,12.18
  Top 0.203: U1.P89 40.57,1.92 v40.27,2.16 | v42.7,20.73 42.17,20.74 41.93,20.74 | U1.P52 31.48,12.68 v32.05,13.26 | 36.57,21.38 v35.9,20.72 | 51.02,12.18 v50.64,11.81
  Top 0.229: 30.22,12.7 26.92,12.7 24.35,15.27 v23.72,15.27 | L2.2 19.01,14.7 19.59,15.28 v20.28,15.28 v20.29,15.27
  Top 0.305: 30.22,12.7 U1.P52 | v35.9,20.72 35.9,18.85 v35.94,18.65 | v50.64,11.81 48.58,11.81 v48.56,11.83 | v40.27,2.16 40.27,4.25 v40.23,4.29 | v42.7,20.73 42.7,20.32 v42.72,18.65 | v34.04,13.26 v32.05,13.26
  Bottom 0.203: 36,20.6 C9.2
  Bottom 0.229: v23.72,15.27 v20.29,15.27
  Bottom 0.305: v48.56,11.83 48.56,18.1 48.01,18.65 v42.72,18.65 v35.94,18.65 35.07,18.65 34.04,17.62 v34.04,13.26 34.04,4.6 34.35,4.29 v40.23,4.29 | v32.05,13.26 32.07,13.26 C13.2
  Bottom 0.406: C10.2 42.7,20.72 v42.7,20.73
1.2V1  (via drill 0.3 pad 0.66)  (3 unrouted)
  Top 0.178: U8.P28 36.57,95.36 | 41.11,95.52 41.13,95.52 | 41.93,94.71 41.13,95.52 | U8.P19 41.09,95.56 41.13,95.52 | U8.P128 51.02,86.16
  Top 0.203: U8.P89 40.57,75.9 v40.27,76.14 | v42.7,94.71 42.17,94.71 41.93,94.71 | U8.P52 31.48,86.66 v32.05,87.23 | 36.57,95.36 v35.9,94.69 | 51.02,86.16 v50.64,85.78
  Top 0.229: 30.22,86.68 26.92,86.68 24.35,89.25 v23.72,89.25 | L6.2 19.01,88.68 19.59,89.26 v20.28,89.26 v20.29,89.25
  Top 0.305: 30.22,86.68 U8.P52 | v35.9,94.69 35.9,92.83 v35.94,92.63 | v50.64,85.78 48.58,85.78 v48.56,85.8 | v40.27,76.14 40.27,78.22 v40.23,78.26 | v42.7,94.71 42.7,94.3 v42.72,92.63 | v34.04,87.23 v32.05,87.23
  Bottom 0.203: 36,94.58 C39.2
  Bottom 0.229: v23.72,89.25 v20.29,89.25
  Bottom 0.305: v48.56,85.8 48.56,92.07 48.01,92.63 v42.72,92.63 v35.94,92.63 35.07,92.63 34.04,91.6 v34.04,87.23 34.04,78.58 34.35,78.26 v40.23,78.26 | v32.05,87.23 32.07,87.23 C43.2
  Bottom 0.406: C40.2 42.7,94.69 v42.7,94.71
1.2V2  (via drill 0.3 pad 0.66)  (3 unrouted)
  Top 0.178: U15.P28 140.59,95.36 | 145.13,95.52 145.15,95.52 | 145.96,94.71 145.15,95.52 | U15.P19 145.11,95.56 145.15,95.52 | U15.P128 155.04,86.16
  Top 0.203: U15.P89 144.59,75.9 v144.29,76.14 | v146.72,94.71 146.19,94.71 145.96,94.71 | U15.P52 135.5,86.66 v136.07,87.23 | 140.59,95.36 v139.92,94.69 | 155.04,86.16 v154.67,85.78
  Top 0.229: 134.24,86.68 130.95,86.68 128.37,89.25 v127.74,89.25 | L9.2 123.03,88.68 123.61,89.26 v124.3,89.26 v124.31,89.25
  Top 0.305: 134.24,86.68 U15.P52 | v139.92,94.69 139.92,92.83 v139.96,92.63 | v154.67,85.78 152.6,85.78 v152.58,85.8 | v144.29,76.14 144.29,78.22 v144.25,78.26 | v146.72,94.71 146.72,94.3 v146.74,92.63 | v138.06,87.23 v136.07,87.23
  Bottom 0.203: 140.02,94.58 C75.2
  Bottom 0.229: v127.74,89.25 v124.31,89.25
  Bottom 0.305: v152.58,85.8 152.58,92.07 152.03,92.63 v146.74,92.63 v139.96,92.63 139.09,92.63 138.06,91.6 v138.06,87.23 138.06,78.58 138.37,78.26 v144.25,78.26 | v136.07,87.23 136.1,87.23 C79.2
  Bottom 0.406: C76.2 146.72,94.69 v146.72,94.71